# Altium PCB usb2ttl.PcbDoc
Units mm, origin at the board's own origin, x right, y up, seen from the top; angles counter-clockwise.
Board outline 50 x 25 mm, 2 copper layers (Top Layer, Bottom Layer); 12 components, 9 nets, 38 pads, 8 vias.
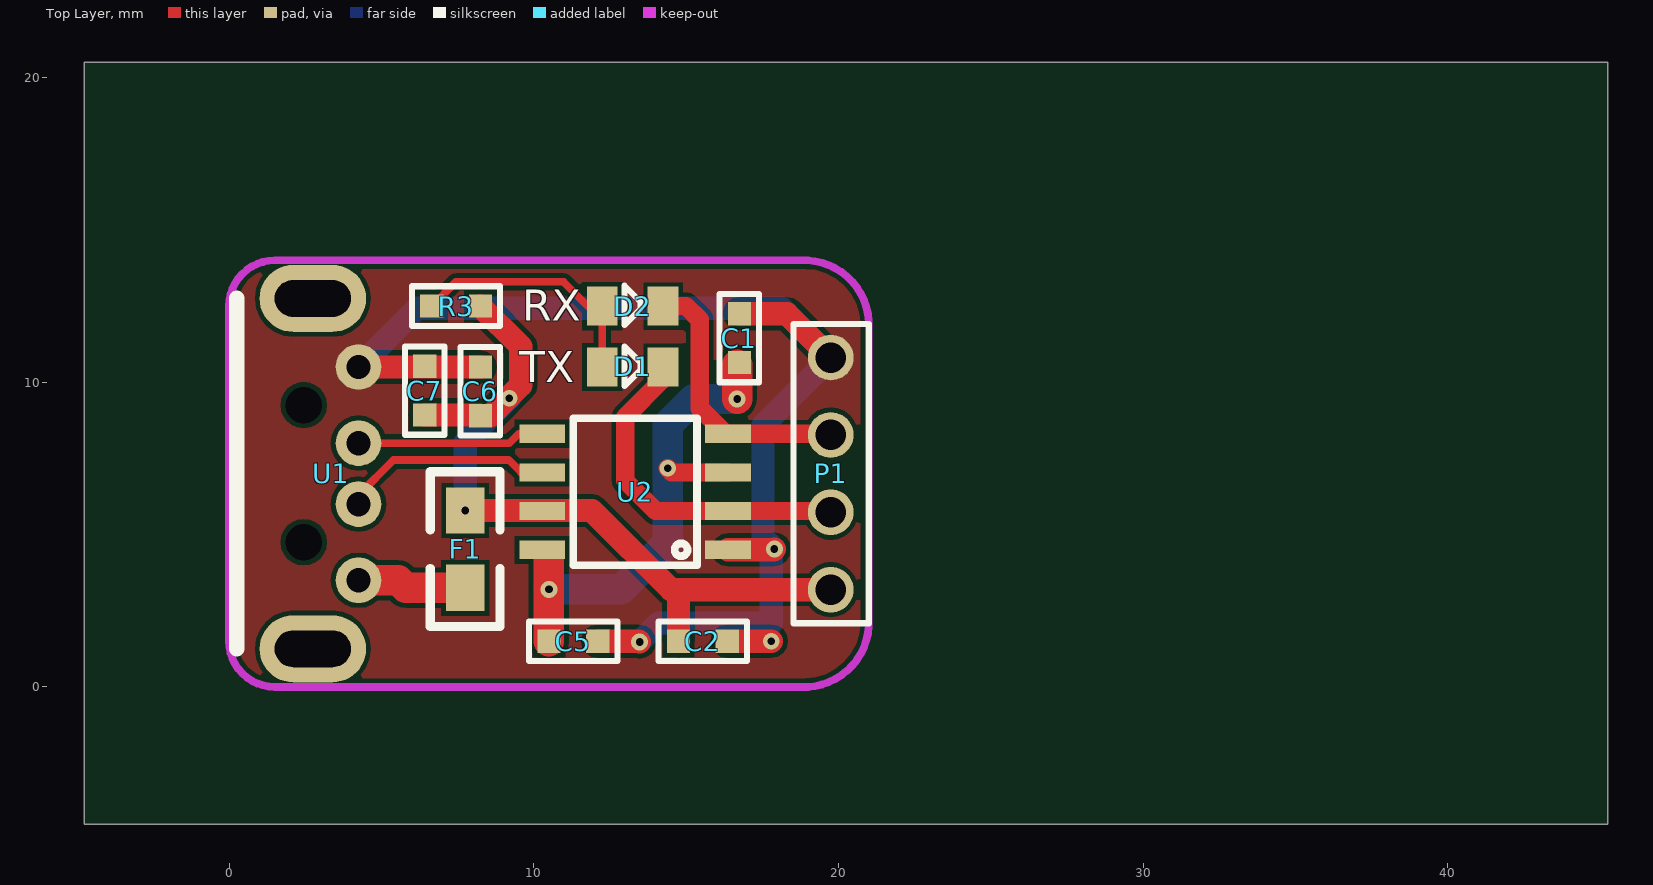
[diagram p0: Top Layer view]
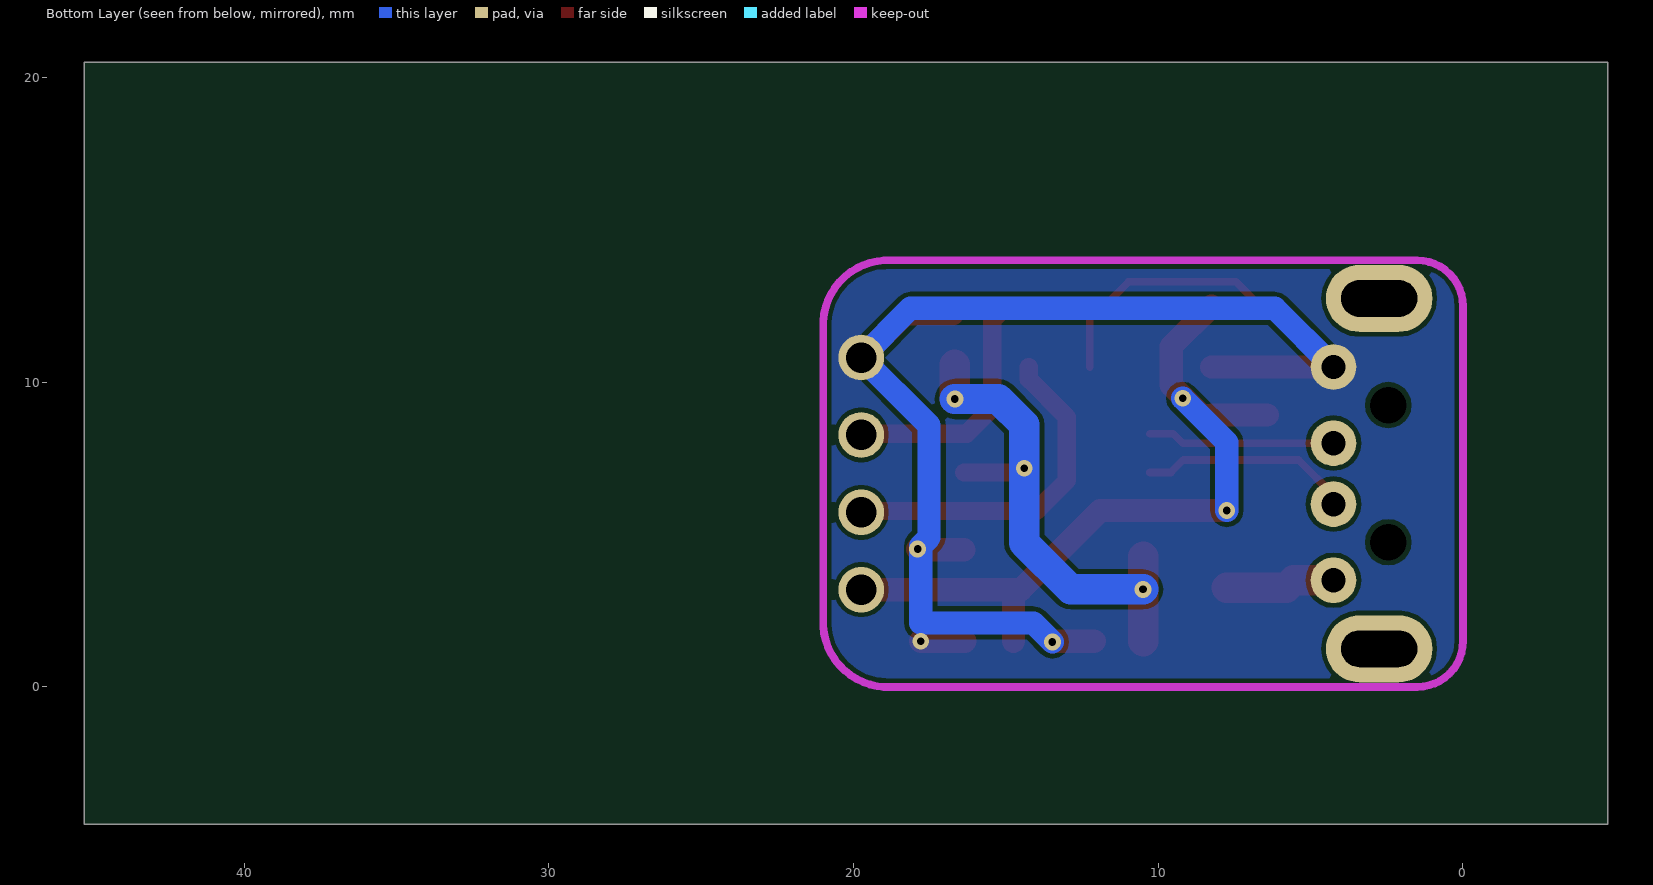
[diagram p1: Bottom Layer view, seen from below]

## Layer stack, top to bottom
Top Layer: signal copper 0.0356
Dielectric: dielectric 0.32, FR-4, Dk 4.8
Bottom Layer: signal copper 0.0356

## Board outline
-4.75,20.5 -4.75,-4.5 45.25,-4.5 45.25,20.5

## Design rules (kind name [scope] priority, off if disabled: settings)
Clearance [All] p1: gap=0.152
ComponentClearance [All] p1 off: gap=0.254 collisioncheckmode=3 verticalgap=0.254 showdistances=FALSE
Height [All] p1 off: minheight=0 maxheight=25.4 prefheight=12.7
HoleToHoleClearance [All] p1 off: gap=0.254 allowstackedmicrovias=TRUE
MinimumSolderMaskSliver [All] p1 off: minsoldermaskwidth=0.254
PlaneConnect [All] p1: planeconnectstyle=Direct reliefexpansion=0.508 reliefentries=4 reliefconductorwidth=0.254 reliefairgap=0.254
PolygonConnect [All] p1: connectstyle=Direct reliefconductorwidth=0.254 reliefentries=4 polygonreliefangle="90 Angle" airgapwidth=0.254
RoutingVias [All] p1: holewidth=0.25 width=0.55 viastyle="Through Hole" minholewidth=0.25 minwidth=0.55 maxholewidth=3 maxwidth=30
SilkToSilkClearance [All] p1 off: silktosilkclearance=0.254
SilkToSolderMaskClearance [IsPad] p1 off: minsilkscreentomaskgap=0.254 clearancetoexposedcopper=TRUE
SolderMaskExpansion [All] p1: expansion=0.102
Width [All] p1: maxlimit=25.4 minlimit=0.152 preferedwidth=0.152 minimp=50.000000 maximp=50.000000 favimp=50.000000
21 further rules are at their usual default settings.

## Components (designator, comment, footprint, x,y, rotation, side; value= is the part's Value field where it differs from the comment)
C1 "C1uF" 0603C 16.75,12.25 r270 top
C2 "104" 0603C 14.75,1.5 r0 top
C5 "104" 0603C 10.5,1.5 r0 top
C6 "C10uF" 0603C 8.25,8.9 r90 top
C7 "104" 0603C 6.425,10.525 r270 top
D1 "LED-G" LED 12.25,10.5 r0 top
D2 "LED-R" LED 12.25,12.5 r0 top
F1 "Fuse 2" 0805 7.75,3.25 r90 top
P1 "Head*4" HEAD*4 19.75,3.19 r0 top
R3 "R4.7K" 0603R 8.25,12.5 r180 top
U1 "USB-A" USB-A 4.25,3.5 r0 top locked
U2 "HT42B534" SOP-8 16.375,4.5 r180 top

## Footprints (in the part's own frame and the unit in brackets; to place one, negate y for a bottom-side part, rotate by r counter-clockwise, add the part's x,y. Pads: shape width x height; smd on the part's side, far side on the other; paste and mask are expansions set on the pad)
0603C [mil]
  rect 30x30 smd: 1(0,0) 2(62.99,0)
  silkscreen extent -26,-26 89,26
0603R [mil]
  rect 30x30 smd: 1(0,0) 2(62.99,0)
  silkscreen extent -26,-26 89,26
0805 [mil]
  rect 60x50 smd: 1(0,0) 2(100,0)
  silkscreen extent -50,-45 150,45
HEAD*4 [mm]
  round 1.5 hole 1: 1(0,0) 2(0,2.54) 3(0,5.08) 4(0,7.62)
  silkscreen extent -1.22,-1.1 1.25,8.72
LED [mil]
  rect 40x50 smd: 1(0,0) 2(78.74,0)
  silkscreen extent 29,-25 49,27
SOP-8 [mm]
  rect 1.5x0.6 smd: 1(0,0) 2(0,-1.27) 3(0,-2.54) 4(0,-3.81) 5(6.096,-3.81) 6(6.096,-2.54) 7(6.096,-1.27) 8(6.096,0)
  silkscreen extent 1.02,-4.32 5.08,0.51
USB-A [mm]
  oval 3.5x2.2 hole 1.2 slot 2.5 at 0 deg: 0(-1.5,-2.25) 0(-1.5,9.25)
  round 1.5 hole 0.8: 1(0,0) 2(0,2.5) 3(0,4.5) 4(0,7)
  round 1 hole 1.2: 5(-1.8,1.25) 5(-1.8,5.75)
  silkscreen extent -4,-2.25 -4,9.25

## Part data
C1 C2 C5 C7: library part C0.1uF
D1 D2: library part LED
F1: "Fuse"
R3: library part R1K

## Via types
v1: diameter 0.55, hole 0.25, Top Layer to Bottom Layer, 8 vias

## Nets (pads, with @x,y where several pads share a name; then routed paths per layer and width w, separated by ;. In a path a pad name is that pad's centre, name@x,y a point inside that pad or via, vN(x,y) a via of type N, cw(c..) or ccw(c..) an arc to the next point about the centre after c; other vN are vias at no path point)
D+: U1.3 U2.5 | length 6.2
  Top Layer w0.254: U1.3 9.2,8 9.51,8.31 U2.5
D-: U1.2 U2.6 | length 7
  Top Layer w0.254: U1.2 4.25,6.3 5.4,7.45 9.175,7.45 9.585,7.04 U2.6
GND: C1.1 C2.2 C5.2 C6.2 C7.1 P1.4 U1.4 U2.1 | length 43.3
  Top Layer w0.762: U1.4 C6.2 ; C5.2 13.45,1.5 v1(13.475,1.475) ; C2.2 v1(17.8,1.5) ; U2.1 17.875,4.5 v1(17.9,4.525) ; C1.1 18.31,12.25 P1.4
  Bottom Layer w0.762: U1.4 6.175,12.425 18.135,12.425 P1.4 17.525,8.585 17.525,4.9 17.8,4.625 17.8,2.1 14.1,2.1 v1(13.475,1.475)
NetD1_1: D1.1 D2.1 R3.2 | length 8.3
  Top Layer w0.254: R3.2 7.45,13.3 10.975,13.3 11.775,12.5 D2.1 D1.1
NetF1_1: F1.1 U1.1 | length 3.6
  Top Layer w1: U1.1 5.55,3.5 5.8,3.25 F1.1
RX: D2.2 P1.3 U2.4 | length 9
  Top Layer w0.6: D2.2 15,12.5 15.45,12.05 15.45,9.15 16.29,8.31 U2.4 19.71,8.31 P1.3
TX: D1.2 P1.2 U2.2 | length 11.4
  Top Layer w0.6: D1.2 14.25,10.1 13,8.85 13,6.775 14.005,5.77 U2.2 P1.2@19.71,5.77
VDD: C2.1 C6.1 C7.2 F1.2 P1.1 R3.1 U2.7 | length 25.8
  Top Layer w0.762: C7.2 8.225,8.925 C6.1 8.575,8.9 9.575,9.9 9.575,11.175 R3.1 ; v1(7.75,5.79) 11.91,5.79 14.51,3.19 14.6,3.19 ; C2.1 14.75,3.04 14.6,3.19 ; P1.1 14.6,3.19
  Bottom Layer w0.762: v1(7.75,5.79) 7.75,8.025 v1(9.2,9.475)
VDDIO: C1.2 C5.1 U2.3 U2.8 | length 17
  Top Layer w0.6: v1(14.4,7.175) 14.535,7.04 U2.3
  Top Layer w1: C5.1 v1(10.5,3.2) U2.8@10.5,4.279 ; v1(16.675,9.45) C1.2@16.675,10.575
  Bottom Layer w1: v1(10.5,3.2) 12.875,3.2 14.4,4.725 v1(14.4,7.175) 14.4,8.6 15.25,9.45 v1(16.675,9.45)
pads on no net: U1.0 U1.5

## Polygon pours and split planes (outlines as drawn)
GND on Top Layer "Keep-Out Layer-No Net" (solid, remove dead copper, pour order 4): -0.225,14.525 -0.15,14.45 21.8,14.45 21.8,-0.525 23.5,-2.225 22.875,-1.6 0.925,-1.6 -0.675,-1.6 -0.825,-1.45
GND on Bottom Layer "Keep-Out Layer-No Net" (solid, remove dead copper, pour order 6): -0.675,15.075 -0.5,14.9 23.85,14.9 23.85,-1.8 22.625,-3.025 21.475,-1.875 -2.625,-1.875

## Keep-outs
Keep-Out Layer:
  lines w0.254: 1.5,0 cw(c1.5,1.5) 0,1.5 0,12.5 cw(c1.5,12.5) 1.5,14 19,14 ; 1.575,0 19,0 ; 18.75,0 ccw(c18.875,2.125) 21,2 21,12 ccw(c18.875,11.875) 18.75,14

## Silkscreen, mask and mechanical layers (free items; w line width, h text height)
Top Overlay:
  text "RX" at 9.625,12.025 h1.02
  text "TX" at 9.525,10 h1.02